# Altium PCB LEDLightRing_PCB.PcbDoc
Units mil, origin at the board's own origin, x right, y up, seen from the top; angles counter-clockwise.
Board outline 2220 x 2220 mil, 2 copper layers (Top Layer, Bottom Layer), stack 62 mil thick; 21 components, 20 nets, 85 pads, 10 vias.
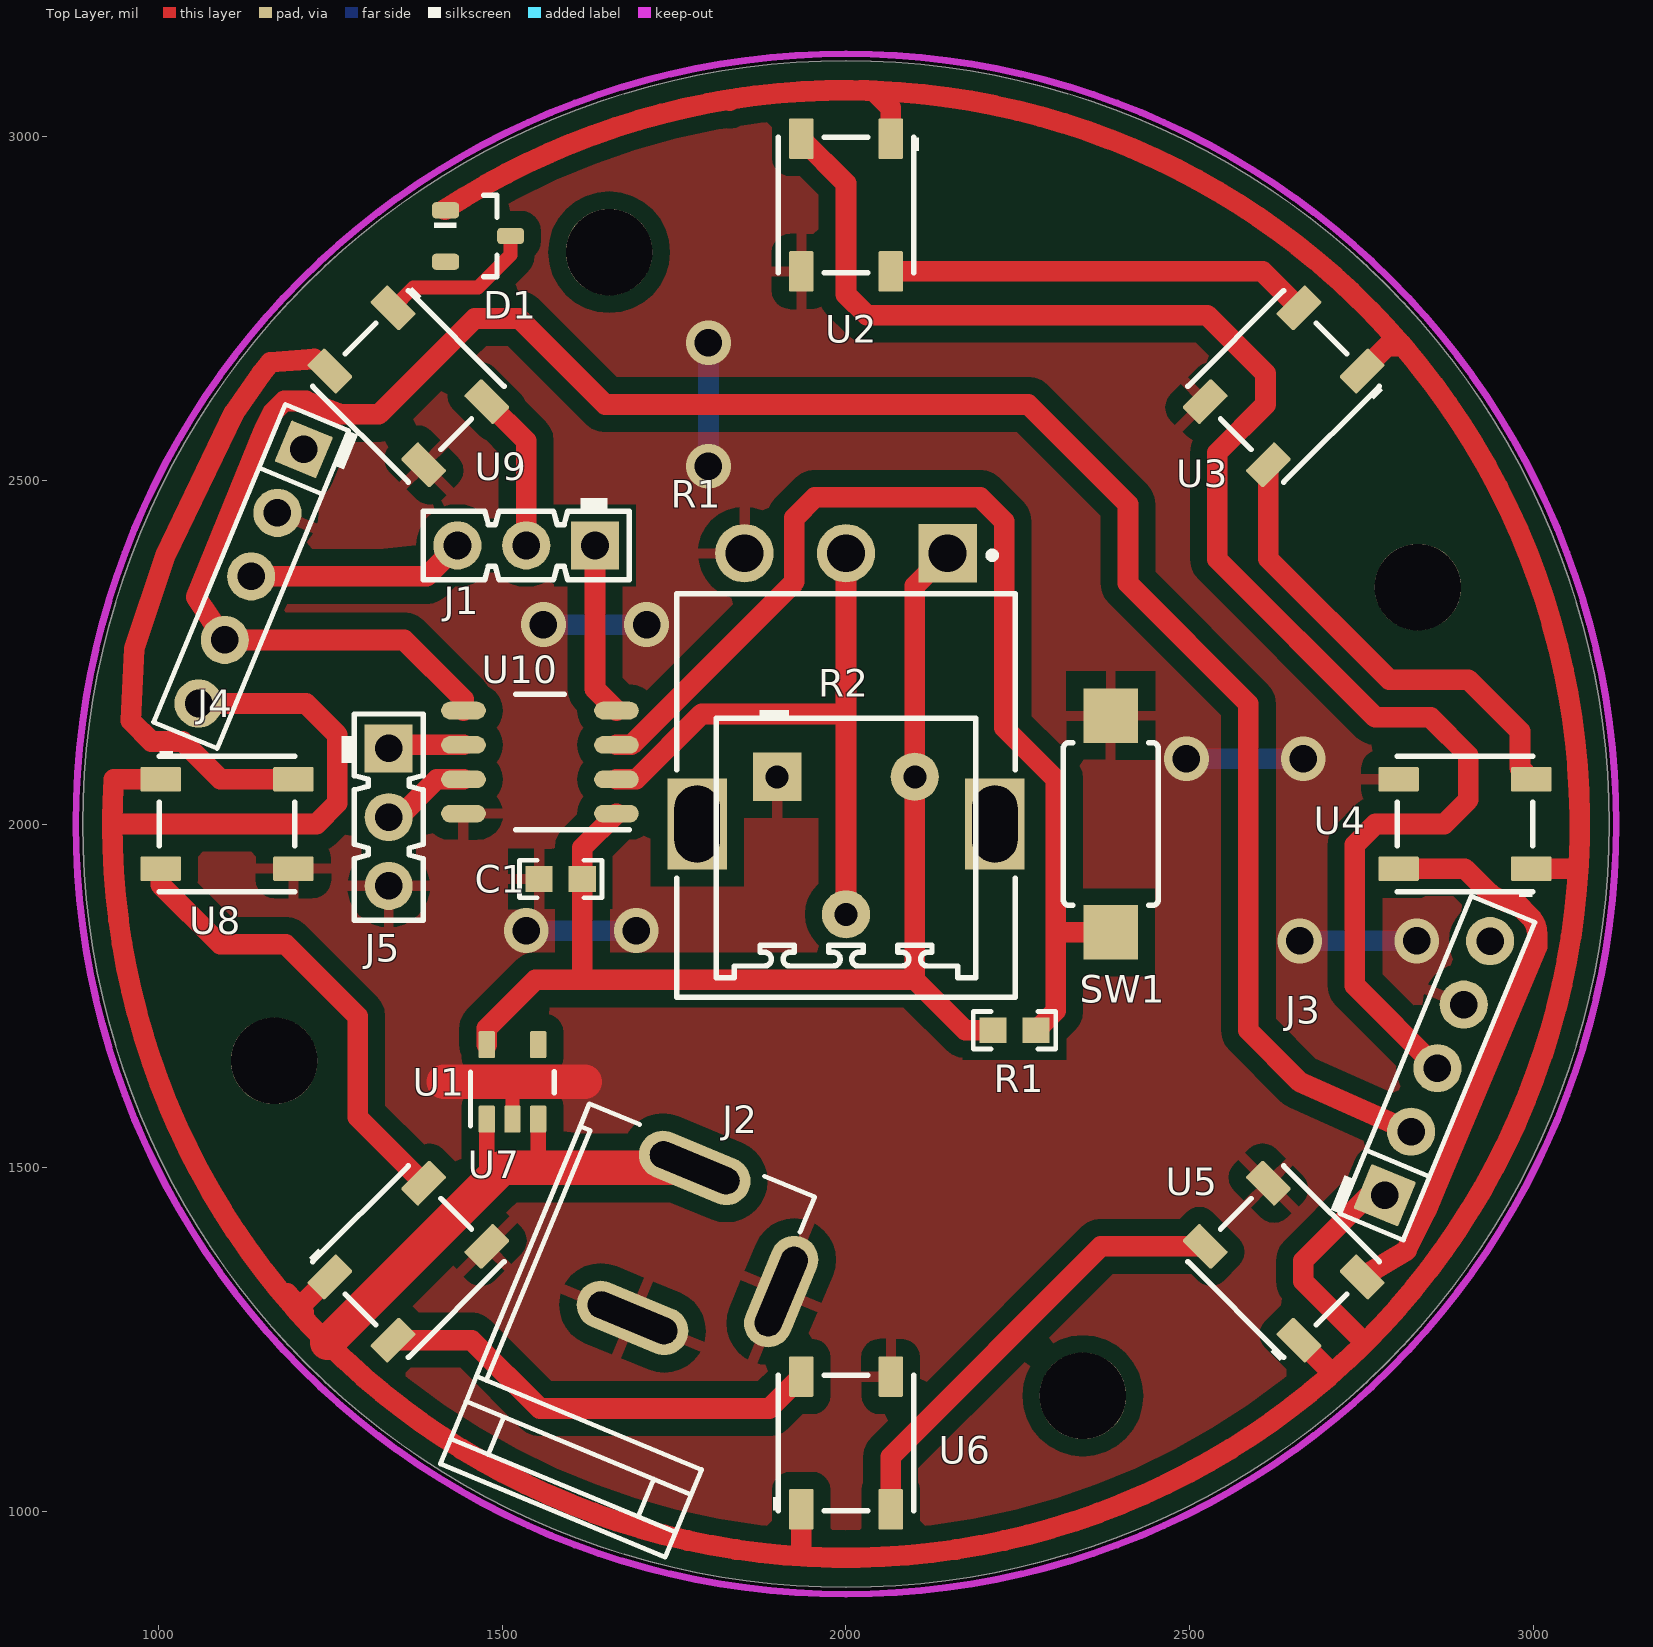
[diagram p0: Top Layer view]
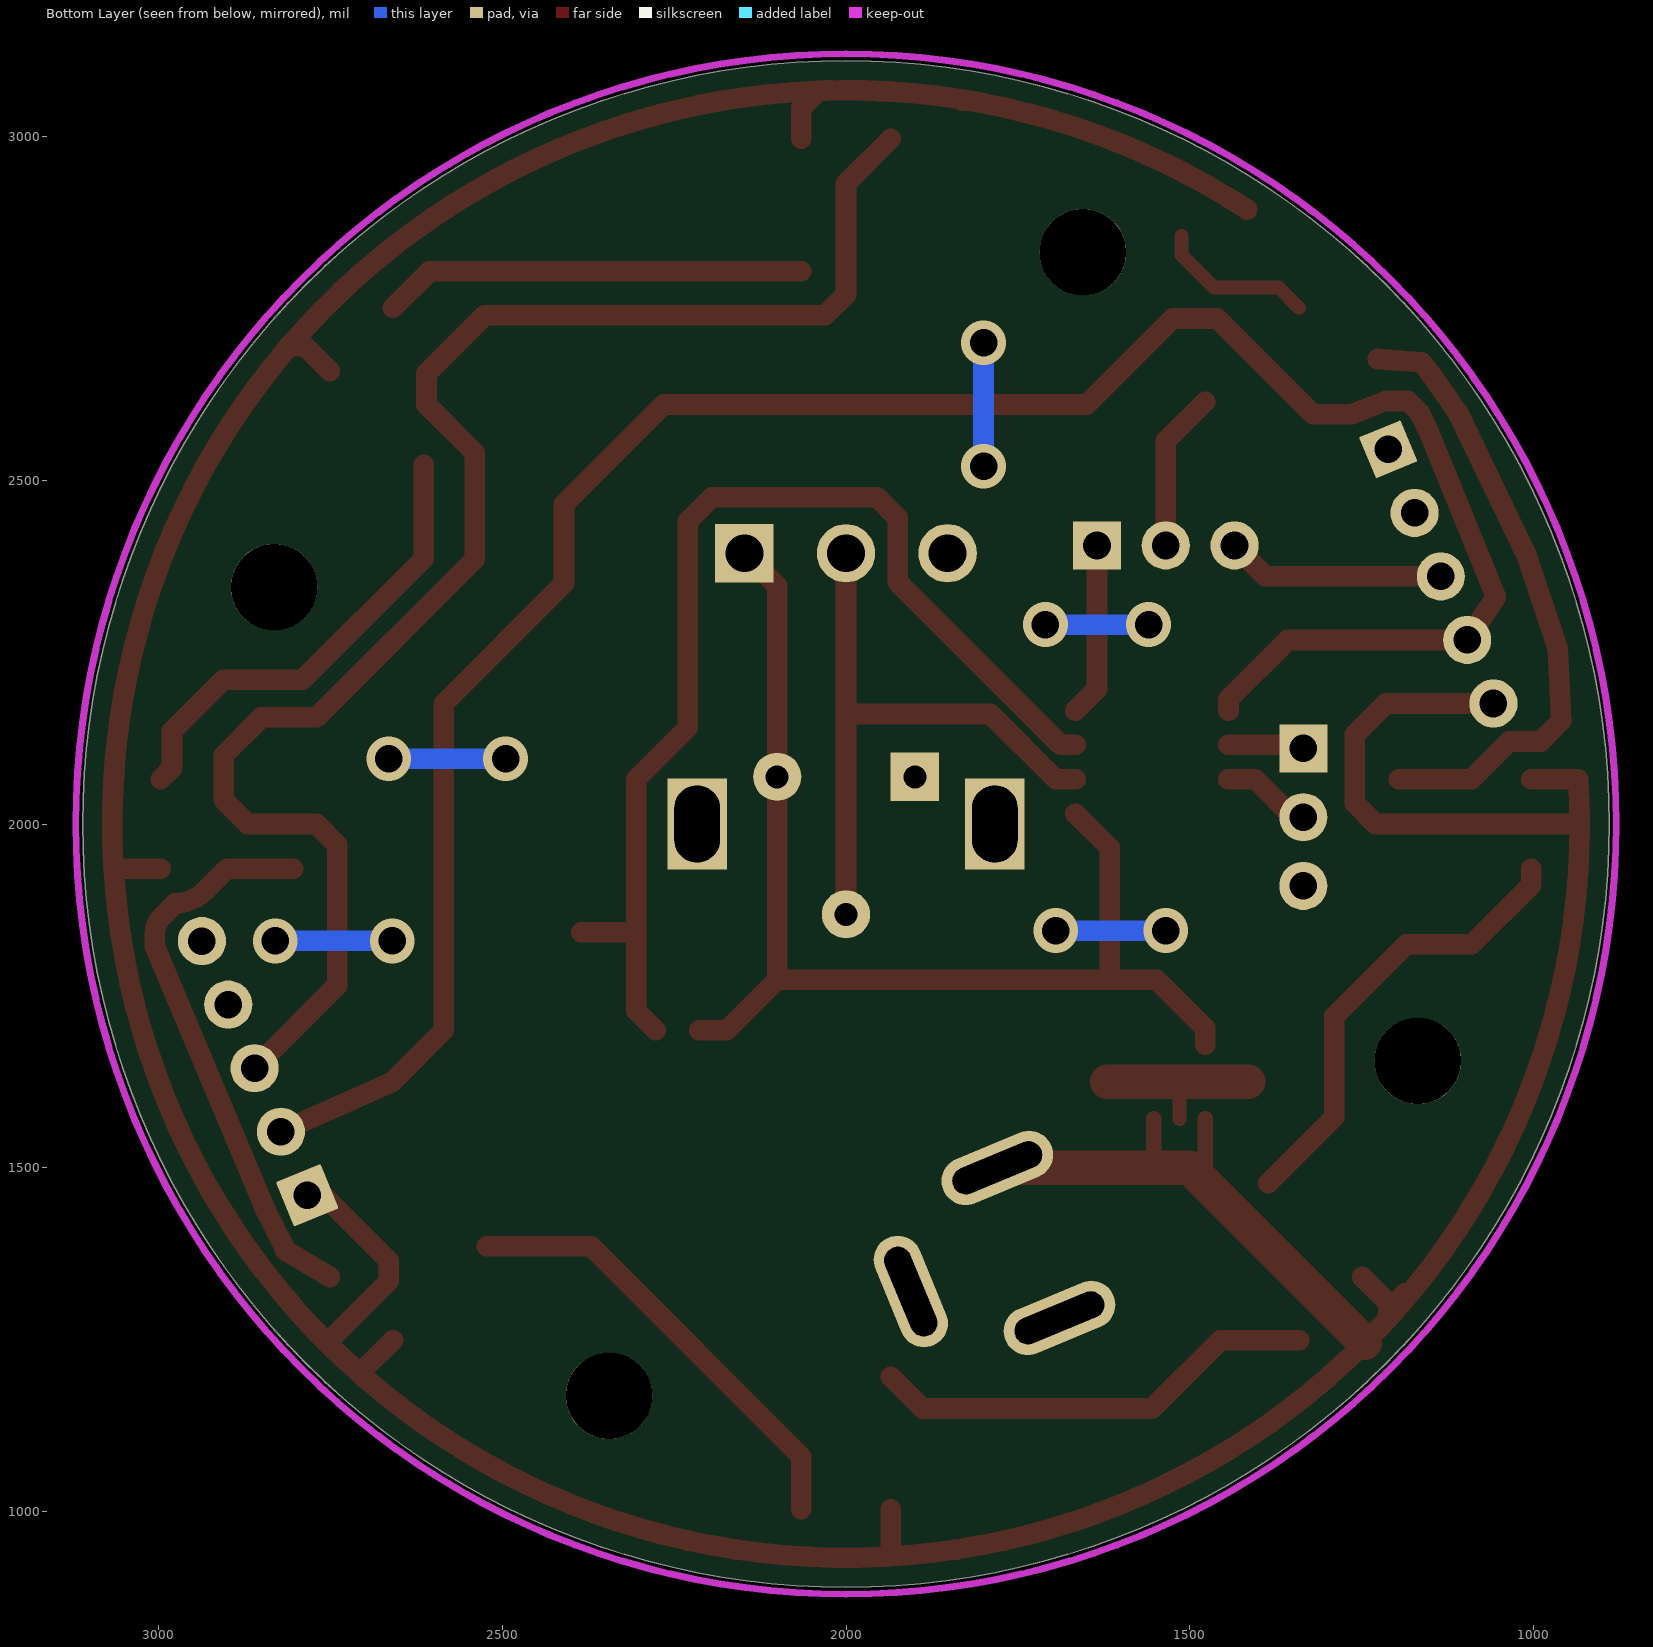
[diagram p1: Bottom Layer view, seen from below]

## Layer stack, top to bottom
Top Layer: signal copper 1.4
Dielectric: core 59.2, FR-4, Dk 4.8
Bottom Layer: signal copper 1.4

## Board outline
2000,890 cw(c2000,2000) 890,2000 cw(c2000,2000) 2000,3110 cw(c2000,2000) 3110,2000 cw(c2000,2000)

## Design rules (kind name [scope] priority, off if disabled: settings)
AcuteAngle [All] p1: minimum=4.50000000000000E+0001 checktracksonly=FALSE
AssemblyTestPointUsage [All] p1: valid=2
Clearance Clearance_Keepouts [((IsTrack Or IsArc) And Not InPoly) And IsFree and IsKeepOut vs ((IsTrack Or IsArc) And Not InPoly) And IsFree and IsKeepOut] p1: gap=0
Clearance Clearance_Poly [InPolygon] p2: gap=25
Clearance [All] p3: gap=7.87
ComponentClearance ComponentClearance_MountingHoles_FiducialMarks [InComponentClass('Mounting Holes') vs InComponentClass('FiducialMark')] p1 off: gap=50 collisioncheckmode=3 verticalgap=10 showdistances=FALSE
ComponentClearance ComponentClearance_Shunt [InComponentClass('Header') vs InComponentClass('Shunt')] p2 off: gap=0 collisioncheckmode=3 verticalgap=0 showdistances=FALSE
ComponentClearance ComponentClearance_Logo [InComponentClass('Logo')] p3 off: gap=50 collisioncheckmode=3 verticalgap=10 showdistances=FALSE
ComponentClearance ComponentClearance_ScrewToNut [(HasFootprint('NY PMS 440 0025 PH')) vs (HasFootprint('Keystone_1902C'))] p4 off: gap=5 collisioncheckmode=3 verticalgap=10 showdistances=FALSE
ComponentClearance ComponentClearance_MountingHoles [InComponentClass('Mounting Holes')] p5 off: gap=250 collisioncheckmode=3 verticalgap=100000 showdistances=FALSE
ComponentClearance ComponentClearance_SmallPassives [HasFootprint('0201*') or HasFootprint('0402*') or HasFootprint('0508') or HasFootprint('0603*') or HasFootprint('0612') or HasFootprint('0805*') or HasFootprint('0815*') or HasFootprint('0830*') or HasFootprint('1206*') or HasFootprint('1210*') or HasFootprint('1808*') or HasFootprint('1812*') or HasFootprint('1825*') or HasFootprint('2010*') or HasFootprint('2220*') or HasFootprint('2225*') or HasFootprint('2512*') or HasFootprint('2728*') or HasFootprint('3518*') vs HasFootprint('0201*') or HasFootprint('0402*') or HasFootprint('0508') or HasFootprint('0603*') or HasFootprint('0612') or HasFootprint('0805*') or HasFootprint('0815*') or HasFootprint('0830*') or HasFootprint('1206*') or HasFootprint('1210*') or HasFootprint('1808*') or HasFootprint('1812*') or HasFootprint('1825*') or HasFootprint('2010*') or HasFootprint('2220*') or HasFootprint('2225*') or HasFootprint('2512*') or HasFootprint('2728*') or HasFootprint('3518*')] p6 off: gap=14.96 collisioncheckmode=3 verticalgap=10 showdistances=FALSE
ComponentClearance ComponentClearance_THtoSMT [IsThruComponent vs IsSMTComponent] p7 off: gap=40 collisioncheckmode=3 verticalgap=30 showdistances=FALSE
ComponentClearance ComponentClearance_THtoTH [IsThruComponent vs IsThruComponent] p8 off: gap=30 collisioncheckmode=3 verticalgap=30 showdistances=FALSE
ComponentClearance [All] p9 off: gap=5 collisioncheckmode=3 verticalgap=10 showdistances=FALSE
DiffPairsRouting [All] p1: maxlimit=100 minlimit=10 mostfreqgap=10 maxuncoupledlength=1000
FabricationTestPointUsage TestPointUsage [All] p1: valid=2 allowmultiple=FALSE
FabricationTestpoint Testpoint [All] p1: side=3 testpointundercomponent=TRUE minsize=40 maxsize=100 preferedsize=60 minholesize=0 maxholesize=40 preferedholesize=32 testpointgrid=1 allowsidetop=TRUE allowsidebottom=TRUE usegrid=TRUE gridtolerance=0.01
FanoutControl Fanout_LCC [IsLCC] p1: bgadir=Out bgaviamode=Centered fanoutstyle=Auto fanoutdirection=Alternating viagrid=1 // Fanout_LCC (Default Rule)
FanoutControl Fanout_BGA [IsBGA] p2: bgadir=Out bgaviamode=Centered fanoutstyle=Auto fanoutdirection=Alternating viagrid=1 // Fanout_BGA (Default Rule)
FanoutControl Fanout_Default [All] p4: bgadir=Out bgaviamode=Centered fanoutstyle=Auto fanoutdirection=Alternating viagrid=1 // Fanout_Default (Default Rule)
FanoutControl Fanout_Small [(CompPinCount < 5)] p5: bgadir=Out bgaviamode=Centered fanoutstyle=Auto fanoutdirection=OutThenIn viagrid=1 // Fanout_Small (Default Rule)
HoleSize [All] p1: absolutevalues=TRUE maxlimit=251 minlimit=7.87 maxpercent=80.000 minpercent=20.000
MinimumAnnularRing MinimumAnnularRing_ThermalPadVias [IsVia and InAnyComponent] p1 off: minimumring=5.91
MinimumAnnularRing [All] p2 off: minimumring=8
MinimumSolderMaskSliver MinimumSolderMaskSliver_Logo [InComponentClass('Logo') vs InComponentClass('Logo')] p1 off: minsoldermaskwidth=0.7
MinimumSolderMaskSliver [All] p2 off: minsoldermaskwidth=3.94
PlaneConnect [All] p1: planeconnectstyle=Relief reliefexpansion=10 reliefentries=4 reliefconductorwidth=10 reliefairgap=10
PolygonConnect PolygonConnect_Vias [All vs isVia] p1: connectstyle=Direct reliefconductorwidth=10 reliefentries=4 polygonreliefangle="90 Angle"
PolygonConnect [All] p2: connectstyle=Relief reliefconductorwidth=15 reliefentries=4 polygonreliefangle="90 Angle"
RoutingVias ThermalPadVias [IsVia and InAnyComponent] p1: holewidth=7.87 width=19.68 viastyle="Through Hole" minholewidth=7.87 minwidth=19.68 maxholewidth=12.99 maxwidth=23.62
RoutingVias [All] p2: holewidth=16 width=34 viastyle="Through Hole" minholewidth=7.87 minwidth=26 maxholewidth=40 maxwidth=65
SilkToSilkClearance SilkToSilkClearance_Pb-FreeLogo [(HasFootprint('Pb-Free_Overlay_Medium') OR HasFootprint('Pb-Free_Overlay_Small')) vs (HasFootprint('Pb-Free_Overlay_Medium') OR HasFootprint('Pb-Free_Overlay_Small'))] p1: silktosilkclearance=0
SilkToSilkClearance [All] p2: silktosilkclearance=4
SilkscreenOverComponentPads SilkToComponentPadClearance [(IsPad or IsFill or IsRegion) and InAnycomponent] p1: minsilkscreentomaskgap=5
SilkscreenOverComponentPads "Silk to Solder Mask Opening" [All] p2: minsilkscreentomaskgap=4
SolderMaskExpansion [All] p1: expansion=1.97
Width [All] p1: maxlimit=100 minlimit=6 preferedwidth=10 checkconnectedcopper=TRUE
14 further rules are at their usual default settings.

## Classes and differential pairs
component class Header: J1 J3 J4 J5

## Components (designator, comment, footprint, x,y, rotation, side; value= is the part's Value field where it differs from the comment)
C1 "UMK107AB7105KA-T" 0603 1585,1920 r180 top
D1 "MMBD914" SOT-23 1465,2855 r0 top
J1 "TSW-103-07-T-S" Samtec_TSW-103-07-T-S 1535,2405 r180 top
J2 "PJ-202AH" CONN_CUI-PJ-202AH 1780,1500 r247.5 top
J3 "TSW-105-07-G-S" TSW-105-07-G-S#1 2860,1645 r67.5 top
J4 "TSW-105-07-G-S" TSW-105-07-G-S#2 1135,2360 r247.5 top
J5 "TSW-103-07-T-S" Samtec_TSW-103-07-T-S 1335,2010 r270 top
R1 "CRCW060310K0JNEA" 0603 2245,1700 r0 top
R1 "296UD104B1N" CTS_296UD 2000,2000 r270 top
R2 "3386F-1-104TLF" Bourns_3386F-T 2000,1965 r0 top
SW1 "RS-032G05A3-SM RT" SW_RS-032G05A3-SM 2385,2000 r270 top
U1 "TPS73633DBV" DBV0005A_N 1515,1625 r90 top
U2 "WS2812B" WS2812B 2000,2900 r270 top
U3 "WS2812B" WS2812B 2636.4,2636.4 r225 top
U4 "WS2812B" WS2812B 2900,2000 r180 top
U5 "WS2812B" WS2812B 2636.4,1363.6 r135 top
U6 "WS2812B" WS2812B 2000,1100 r90 top
U7 "WS2812B" WS2812B 1363.6,1363.6 r45 top
U8 "WS2812B" WS2812B 1100,2000 r0 top
U9 "WS2812B" WS2812B 1363.6,2636.4 r315 top
U10 "MSP430G2230QDREP" D0008A_M 1555,2090 r180 top

## Footprints (in the part's own frame and the unit in brackets; to place one, negate y for a bottom-side part, rotate by r counter-clockwise, add the part's x,y. Pads: shape width x height; smd on the part's side, far side on the other; paste and mask are expansions set on the pad)
0603 [mm] "0603 from SM-752 data"
  rect 1x0.95 smd: 1(-0.8,0) 2(0.8,0)
  silkscreen extent -1.52,-0.69 1.52,0.69, body extent -0.87,-0.47 0.87,0.47, height 1
Bourns_3386F-T [mil] "TH, 3-Leads, Body 9.53x9.53mm"
  rect 70x70 hole 33.46: 1(-100,103.63)
  round 70 hole 33.46: 2(0,-96.37) 3(100,103.63)
  silkscreen extent -188,-189 188,201, body extent -189,-188 188,189, height 415
CONN_CUI-PJ-202AH [mil] "Conn_DC Jack"
  oval 70x170 hole 39.37 slot 137.8 at 90 deg: 1(0,0) 2(236.22,0)
  oval 170x70 hole 39.37 slot 137.8 at 180 deg: 3(118.11,185.04)
  silkscreen extent -28,-177 539,177, body extent -28,-177 539,193, height 434
CTS_296UD [mm] "TH, 3-Leads, Body 12.5x12.8mm, Height 23.2mm"
  rect 2.159x2.159 hole 1.4: 1(-10,3.75)
  round 2.159 hole 1.4: 2(-10,0) 3(-10,-3.75)
  rect 3.35x2.2 hole 1.68 slot 2.85 at 0 deg: MH1(0,5.5) MH2(0,-5.5)
  silkscreen extent -10.05,-6.25 6.4,6.25, body extent -10.2,-6.25 6.4,6.25, height 23.2
D0008A_M [mm] "SOIC, 8-Leads, Body 4.9x3.9mm, Pitch 1.27mm, IPC Low Density"
  oval 1.65x0.65 smd: 1(-2.825,1.905) 2(-2.825,0.635) 3(-2.825,-0.635) 4(-2.825,-1.905) 5(2.825,-1.905) 6(2.825,-0.635) 7(2.825,0.635) 8(2.825,1.905)
  silkscreen extent -3.3,-2.5 0.9,2.5, body extent -3,-2.45 3,2.45, height 1.63
DBV0005A_N [mm] "SOT23, 5-Leads, Body 2.9x1.6mm, Pitch 0.95mm, Lead Span 2.8mm, IPC Medium Density"
  rrect17% 1x0.6 smd: 1(-1.375,0.95) 2(-1.375,0) 3(-1.375,-0.95) 4(1.375,-0.95) 5(1.375,0.95)
  silkscreen extent -1.63,-1.55 0.38,1.55, body extent -1.42,-1.46 1.42,1.46, height 1.09
Samtec_TSW-103-07-T-S [mil] "Header, 2.54 mm, 3x1, TH"
  rect 70x70 hole 40.16: 1(-100,0)
  round 70 hole 40.16: 2(0,0) 3(100,0)
  silkscreen extent -150,-69 150,50, body extent -150,-50 150,50, height 330
SOT-23 [mm] "SOT23, 3-Leads, Body 2.9x1.3mm, Pitch 0.95mm, Lead Span 2.5mm, IPC Medium Density"
  rrect50% 1x0.6 smd: 1(-1.2,0.95) 2(-1.2,-0.95) 3(1.2,0)
  silkscreen extent -1.63,-1.5 0.7,1.5, body extent -1.16,-1.45 1.21,1.45, height 1
SW_RS-032G05A3-SM [mm] "SMT, 2-Leads, Body 6x3.5mm, Pin Spacing 8mm"
  rect 2x2 smd: 1(-4,0) 2(4,0)
  silkscreen extent -3,-1.75 3,1.75, body extent -4,-1.75 4,1.75, height 4.3
TSW-105-07-G-S#1 [mil] "Samtec 100mil, 1x5, 230 mil above insulator"
  rrect6% 70x70 hole 40: 1(-200,0)
  round 70 hole 40: 2(-100,0) 3(0,0) 4(100,0) 5(200,0)
  silkscreen extent -250,-50 250,65, body extent -250,-50 250,50, height 330
TSW-105-07-G-S#2 [mil] "Samtec 100mil, 1x5, 230 mil above insulator"
  rrect6% 64.96x64.96 hole 40: 1(-200,0)
  round 70 hole 40: 2(-100,0) 3(0,0) 4(100,0) 5(200,0)
  silkscreen extent -250,-50 250,65, body extent -250,-50 250,50, height 330
WS2812B [mm] "SMD, 4-Leads, Body 5x5mm"
  rrect11% 1.5x0.9 smd: 1(-2.45,1.65) 2(-2.45,-1.65) 3(2.45,-1.65) 4(2.45,1.65)
  silkscreen extent -2.5,-2.5 2.5,2.7, body extent -2.7,-2.5 2.7,2.5, height 1.67

## Part data
C1: "CAP, CERM, 1 µF, 50 V, +/- 10%, X7R, 0603"
D1: "Diode, P-N, 100 V, 0.2 A, SOT-23"
J1 J5: "Header, 2.54 mm, 3x1, Tin, TH"
J2: "Connector, DC Jack 2.1X5.5 mm, TH"
J3 J4: "Header, 100mil, 5x1, Gold, TH"
R1: "RES, 10 k, 5%, 0.1 W, 0603"
R1: "Trimmer, 100k ohms, 0.15 W, TH"
R2: library part 3386F-1-103TLF, "TRIMMER 100K OHM 0.5W, TH"
SW1: "Switch, Tactile, SPST-NO, 0.05A, 12V, SMD"
U1: "Cap-Free, NMOS, 400mA Low-Dropout Regulator with Reverse Current Protection, DBV0005A"
U2 U3 U4 U5 U6 U7 U8 U9: "Intelligent Control LED Integrated Light Source"
U10: "Enhanced Product 16-bit Ultra-Low-Power Mixed Signal Microcontroller, 2kB Flash, 128B RAM, D0008A (SOIC-8)"

## Free pads (board coordinates)
  round 125.98 hole 125.98: 0(1168.51,1655.58) 0(1655.58,2831.49) 0(2344.42,1168.51) 0(2831.49,2344.42)

## Via types
v1: diameter 65, hole 40, Top Layer to Bottom Layer, 10 vias

## Nets (pads, with @x,y where several pads share a name; then routed paths per layer and width w, separated by ;. In a path a pad name is that pad's centre, name@x,y a point inside that pad or via, vN(x,y) a via of type N, cw(c..) or ccw(c..) an arc to the next point about the centre after c; other vN are vias at no path point)
GND: C1.2 J2.2 J2.3 J3.4 J4.2 J5.3 R1.3 R2.1 SW1.1 U1.2 U2.3 U3.3 U4.3 U5.3 U6.3 U7.3 U8.3 U9.3 U10.8 | length 1104.1
  Top Layer w20: U1.2 1515,1625
  Top Layer w30: v1@1700,2290 v1(1710,2290) ; v1(1800,2700) v1@1800,2705
  Top Layer w50: 1415,1625 1515,1625 1620,1625
  Bottom Layer w30: v1(1535,1845) v1(1695,1845) ; v1(1560,2290) v1(1710,2290) ; v1(1800,2520) v1(1800,2700) ; v1(2495,2095) v1(2665,2095) ; v1(2660,1830) v1(2830,1830)
NetD1_3: D1.3 U9.1 | length 230.4
  Top Layer w20: U9.1 1370.8,2780 1465,2780 1512.24,2827.24 D1.3
NetJ1_1: J1.1 U10.4 | length 252.9
  Top Layer w30: J1.1 1635,2196.22 U10.4
NetJ1_2: J1.2 U9.4 | length 232.8
  Top Layer w30: U9.4 1535,2556.87 J1.2
NetJ1_3: J1.3 J4.3 | length 318.6
  Top Layer w30: J4.3 1390,2360 J1.3
NetJ3_2: J3.2 J4.4 U10.5 | length 3309
  Top Layer w30: U10.5 1443.78,2181.22 1357.39,2267.61 J4.4 1055,2330 1153.13,2571.69 1166.5,2598.5 1183,2615 1215,2615 1265,2595.82 1320.82,2595.82 1460,2735 1525,2735 1650,2610 2265,2610 2410,2465 2410,2350 2585,2175 2585,1700 2660,1625 J3.2
NetJ3_3: J3.3 U2.2 | length 2324.7
  Top Layer w30: U2.2 2000,2931.5 2000,2770 2030,2740 2525,2740 2610,2655 2610,2610 2540,2540 2540,2385 2770,2155 2850,2155 2905,2100 2905,2035 2870,2000 2770,2000 2740,1970 2740,1765 J3.3
NetJ5_1: J5.1 U10.6 | length 125.9
  Top Layer w30: J5.1@1320,2110 1325,2115 U10.6
NetJ5_2: J5.2 U10.7 | length 131.6
  Top Layer w30: J5.2 1350,2010 1405,2065 U10.7
NetR1_2: R1.2@2276.5,1700 SW1.2 U10.3 | length 1645.8
  Top Layer w30: U10.3 1687.94,2115 1925,2352.06 1925,2445 1955,2475 2195,2475 2230,2440 2230,2140 2305,2065 2305,1840 ; R1.2@2276.5,1700 2305,1728.5 2305,1840 ; SW1.2 2307.52,1842.52 2305,1840
NetR1_2: R1.2@2000,2393.7 R2.2 U10.2 | length 973.2
  Top Layer w30: U10.2 1695,2065 1790,2160 ; 1865,2160 1790,2160 ; R2.2 2000,2160 ; R1.2@2000,2393.7 2000,2160 ; 1790,2160 2000,2160
NetU2_4: U2.4 U3.2 | length 615.7
  Top Layer w30: U2.4 2605.66,2803.54 U3.2
NetU3_4: U3.4 U4.2 | length 683
  Top Layer w30: U3.4 2614.12,2385.88 2790,2210 2905,2210 2980,2135 2980,2081.42 U4.2
NetU4_4: U4.4 U5.2 | length 819.9
  Top Layer w30: U5.2 2815,1380 2843.8,1438.04 2855.13,1465 3005,1821.5 3005,1838.92 ccw(c2960.24,1839.24) 3005,1839.24 3005,1840 ccw(c2968.79,1840) 2994.39,1865.61 2975,1885 cw(c2975,1945.36) 2932.32,1902.68 2899.96,1935.04 U4.4
NetU5_4: U5.4 U6.2 | length 660.4
  Top Layer w30: U6.2 2064.96,1079.96 2370.88,1385.88 U5.4
NetU6_4: U6.4 U7.2 | length 654.1
  Top Layer w30: U7.2 1455.54,1249.46 1555,1150 1888.58,1150 U6.4
NetU7_4: U7.4 U8.2 | length 671.3
  Top Layer w30: U8.2 1003.54,1911.46 1090,1825 1185,1825 1290,1720 1290,1573.62 U7.4
NetU8_4: U8.4 U9.2 | length 904.6
  Top Layer w30: U8.4 1090.44,2064.96 1035.4,2120 990,2120 960,2150 965,2255 1010,2390 1110.14,2597.98 1150,2655 1163.17,2671.46 U9.2@1227.01,2676.16
P3V3: C1.1 R1.1 R2.3 U1.5 U10.1 | length 1721.8
  Top Layer w30: U1.5 1477.6,1702.6 1548.5,1773.5 1615,1773.5 ; U10.1 1616.5,1965.28 C1.1 1616.5,1775 1615,1773.5 ; R1.1@2147.64,2393.7 2100,2346.06 R2.3 2100,1773.5 ; R1.1@2213.5,1700 2173.5,1700 2100,1773.5 ; 1615,1773.5 2100,1773.5
P5V: D1.1 J2.1 J3.1 J4.5 U1.1 U1.3 U2.1 U3.1 U4.1 U5.1 U6.1 U7.1 U8.1 | length 8254.6
  Top Layer w23: 1477.5,1477.5 1477.6,1477.6 U1.1 ; 1550,1500 1552.4,1502.4 U1.3 ; 1597.6,1502.4 1600,1500 ; 1670,1500 1672.4,1502.4
  Top Layer w30: 933.18,1981.38 cw(c2000,2000) 933.02,2000 ; 933.18,2018.62 ccw(c2000,2000) 933.02,2000 ; 935.02,2064.96 U8.1 ; 935.02,2065.31 ccw(c2000,2000) 933.02,2000 ; J4.5 1214.78,2175.22 1260,2130 1260,2030 1230,2000 933.02,2000 ; 1187.09,1317.89 ccw(c2000,2000) 1199.12,1303.8 ; 1232.48,1258.81 ccw(c2000,2000) 1245.53,1245.53 ; U7.1 1211.94,1303.8 1199.12,1303.8 ; 1258.81,1232.48 cw(c2000,2000) 1245.53,1245.53 ; D1.1@1416.97,2893.6 cw(c2000,2000) 1833.09,3053.85 ; 1814.72,3050.77 cw(c2000,2000) 1833.09,3053.85 ; 1830.87,3051.62 1833.09,3053.85 ; 1851.5,3056.6 ccw(c2000,2000) 1833.09,3053.85 ; 1935.04,950.47 U6.1 ; 2021.24,3066.77 cw(c2000,2000) 2039.86,3066.24 2064.96,3041.14 U2.1 ; U5.1 2696.74,1211.39 ; 2741.19,1232.48 ccw(c2000,2000) 2754.47,1245.53 ; U3.1 2786.66,2694.79 2809.76,2694.79 ; 2767.52,1258.81 cw(c2000,2000) 2754.47,1245.53 ; J3.1 2760.22,1460.22 2665,1365 2665,1335 2754.47,1245.53 ; 2819.04,2683.83 ccw(c2000,2000) 2809.76,2694.79 ; 2830.1,2670.36 ccw(c2000,2000) 1833.09,3053.85 ; 2874.02,1388 ccw(c2000,2000) 2884.57,1403.35 ccw(c2000,2000) 2894.85,1418.88 ; U4.1 3049.53,1935.04 ; 933.02,2000 ccw(c2000,2000) 1245.53,1245.53 ; 1199.12,1303.8 ccw(c2000,2000) 1211.39,1289.93 cw(c2000,2000) 1199.12,1303.8 ; 1245.53,1245.53 ccw(c2000,2000) 2754.47,1245.53 ; 2754.47,1245.53 ccw(c2000,2000) 2809.76,2694.79
  Top Layer w50: 1245.53,1245.53 1477.5,1477.5 ; 1477.6,1477.6 1500,1500 1550,1500 1600,1500 1670,1500 J2.1
pads on no net: D1.2 J3.5 J4.1 R1.MH1 R1.MH2 U1.4

## Polygon pours and split planes (outlines as drawn)
GND on Top Layer "TOP_LAYER_GND_P000" (solid, remove dead copper, pour order 0): 890,3110 3105,3110 3105,1750 3105,895 1925,895 890,895 890,3110

## Keep-outs
Keep-Out Layer:
  circle w10: c2000,2000 r1120

## Silkscreen, mask and mechanical layers (free items; w line width, h text height)
M1 Board Outline:
  circle w10: c2000,2000 r1110
M9 Title Sheet:
  drawing of 57 lines, arcs and shapes, not listed
  text "1" at 739.84,8036.5 h70
  text "2" at 3235.5,8036.5 h70
  text "3" at 5724.84,8036.5 h70
  text "4" at 8231.51,8036.5 h70
  text "5" at 10730.5,8036.5 h70
  text "6" at 13235.5,8036.5 h70
  text "A" at -416.5,6893.5 h70
  text "A" at 14383.5,6893.5 h70
  text "B" at -416.5,4513.5 h70
  text "B" at 14383.5,4513.5 h70
  text "C" at -416.5,2138.5 h70
  text "C" at 14383.5,2138.5 h70
  text "PROJECT TITLE:" at 11343.5,277.5 h45
  text ".PRJ_Title" at 11393.5,144.17 h70
  text "DESIGNED FOR:" at 11343.5,-23.5 h45
  text ".PRJ_Customer" at 11393.5,-163.5 h70
  text "D" at -416.5,-231.5 h70
  text "D" at 14383.5,-231.5 h70
  text "FILE NAME:" at 11343.5,-323.5 h45
  text ".PCB_File_Name_No_Path" at 11393.5,-443.5 h70
  text "Texas Instruments (TI) and/or its licensors do not warrant the accuracy or completeness of this specification" at 6374,-605.34 h45
  text "ENGINEER:" at 11343.5,-613.5 h45
  text "LAYOUT BY:" at 12848.5,-613.5 h45
  text "or any information contained therein. TI and/or its licensors do not warrant that this design will meet" at 6329.01,-718 h45
  text ".PRJ_Engineer" at 11393.5,-768.49 h70
  text ".PCB_Layout" at 12899,-768.49 h70
  text "the specifications, will be suitable for your application or fit for any particular purpose, or will operate in" at 6329.01,-830.67 h45
  text ".Layer_Name" at 577,-858.49 h60
  text "ALTIUM DESIGNER VERSION:" at 12848.5,-923.5 h45
  text "an implementation. TI and/or its licensors do not warrant that the design is production worthy. You should" at 6329.01,-943.33 h45
  text "completely validate and test your design implementation to confirm the system functionality for your application." at 6374,-1056 h45
  text ".print_Scale" at 11393.5,-1056.83 h70
  text ".Application_BuildNumber" at 12899,-1056.83 h70
  text "1" at 739.84,-1263.5 h70
  text "2" at 3235.5,-1263.5 h70
  text "3" at 5724.84,-1263.5 h70
  text "4" at 8231.51,-1263.5 h70
  text "5" at 10730.5,-1263.5 h70
  text "6" at 13235.5,-1263.5 h70

## Text inside footprints (layer, text, board x,y; h text height)
J2: M1 Board Outline "board edge" at 1267.28,1064.64 h35 r337.5